# Altium PCB Powerboard PCB.PcbDoc
Units mil, origin at the board's own origin, x right, y up, seen from the top; angles counter-clockwise.
Board outline 2700 x 2100 mil, 2 copper layers (Top Layer, Bottom Layer), stack 62.8 mil thick; 13 components, 31 nets, 58 pads, 18 vias.
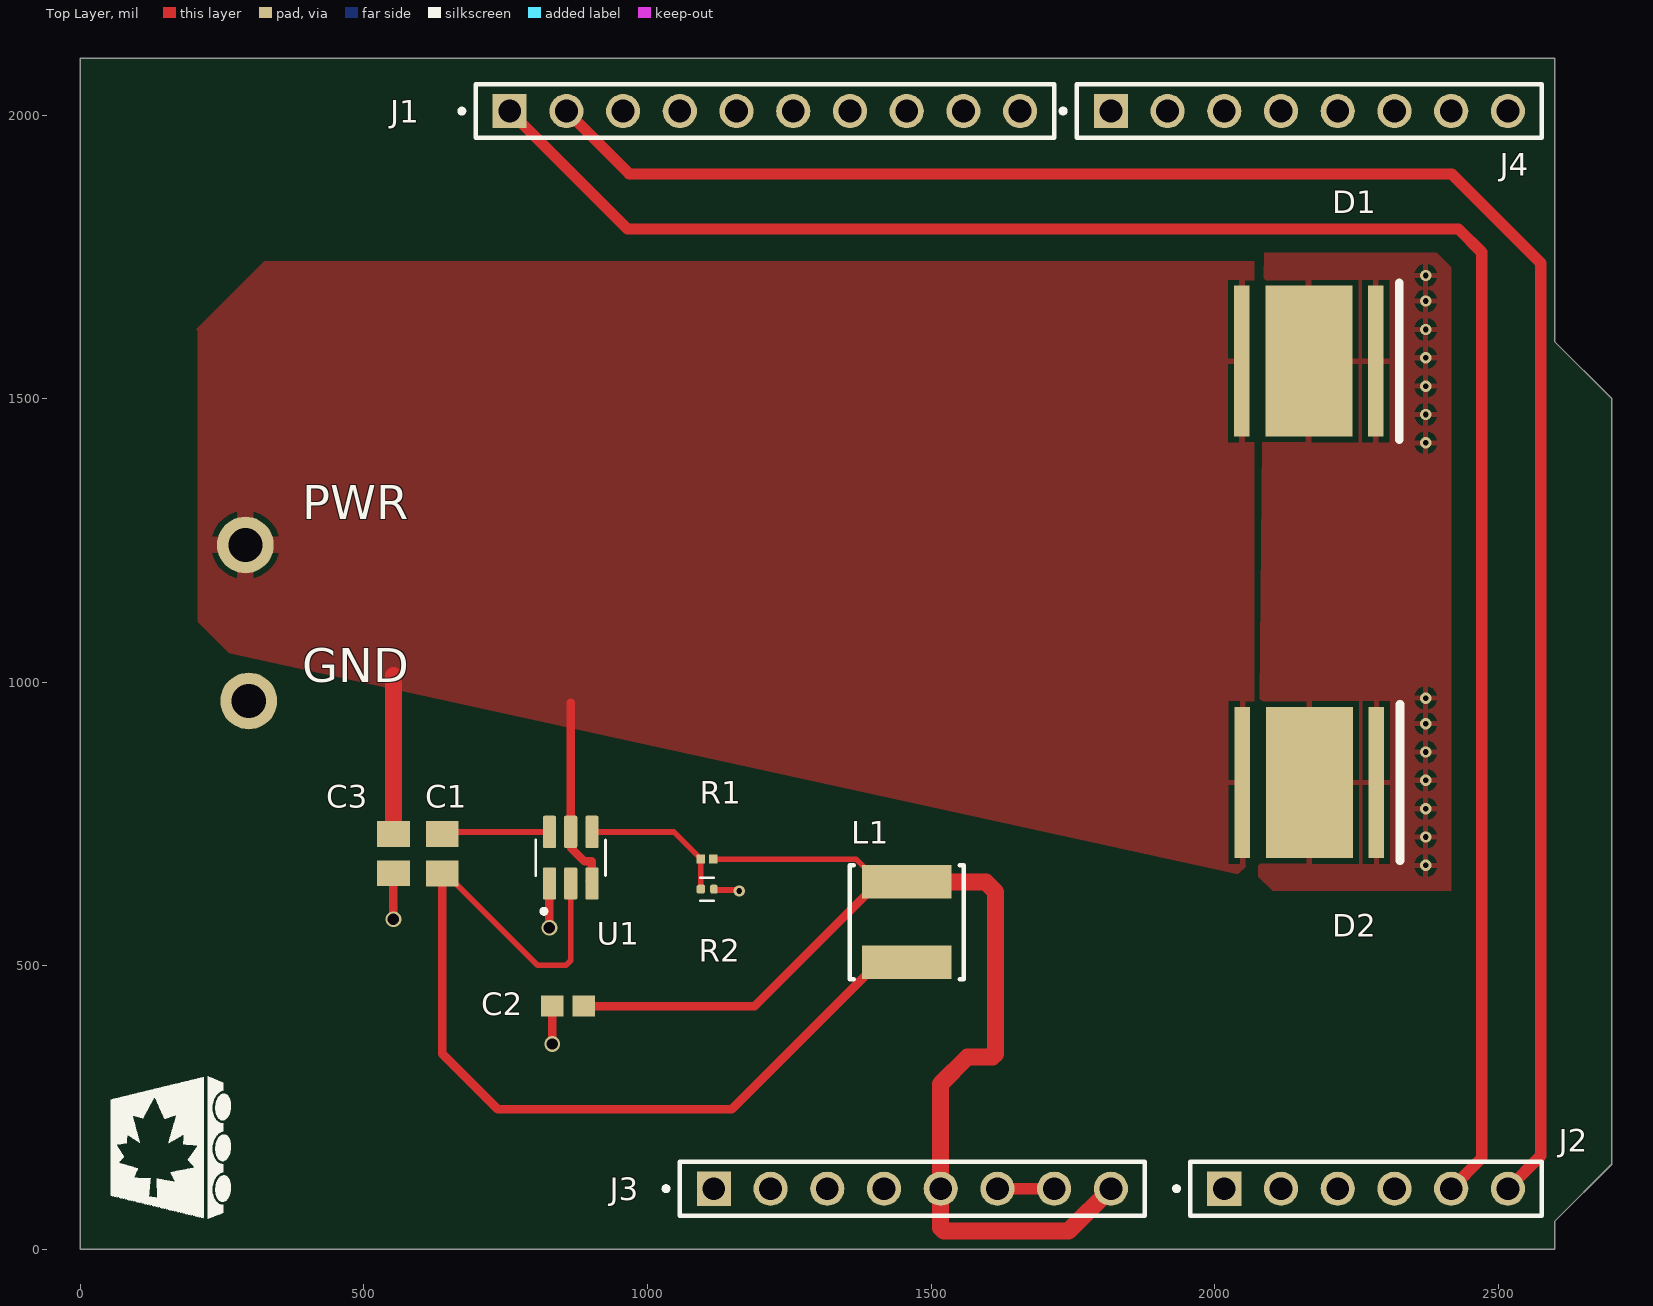
[diagram p0: Top Layer view]
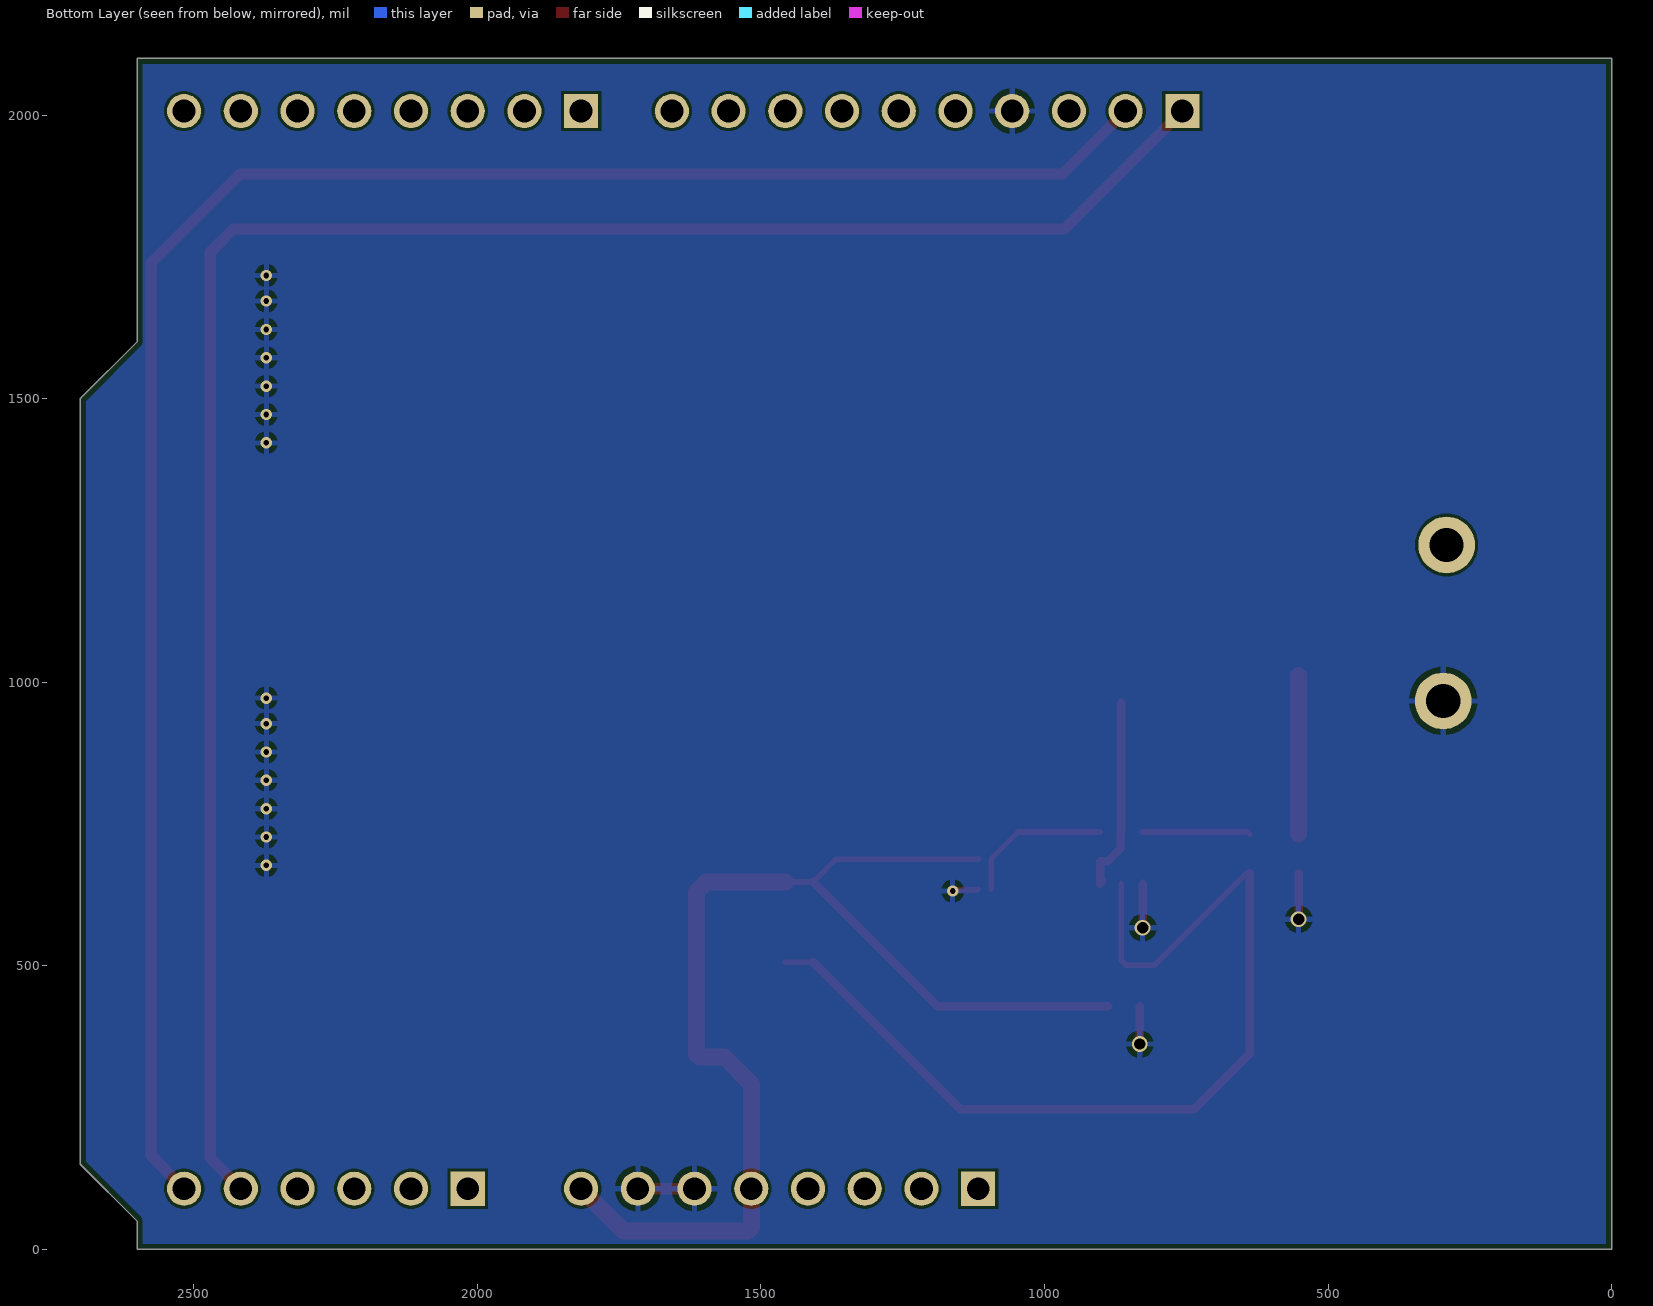
[diagram p1: Bottom Layer view, seen from below]

## Layer stack, top to bottom
Top Solder: solder mask 0.4, Solder Resist, Dk 3.5
Top Layer: signal copper 1.4
Dielectric 1: dielectric 60, FR-4, Dk 4.8
Bottom Layer: signal copper 1.4
Bottom Solder: solder mask 0.4, Solder Resist, Dk 3.5

## Board outline
0,0 0,2100 2600,2100 2600,1600 2700,1500 2700,150 2600,50 2600,0

## Design rules (kind name [scope] priority, off if disabled: settings)
BoardOutlineClearance [All] p1: gap=10 ignorepadtopadclearanceinfootprint=FALSE
Clearance [All] p1: gap=5 ignorepadtopadclearanceinfootprint=TRUE except(0: Arc-Hole Track-Hole SMDPad-Hole THPad-Hole Via-Hole Fill-Hole Poly-Hole Region-Hole Text-Hole)
MinimumSolderMaskSliver [All] p1: minsoldermaskwidth=5
PolygonConnect [All] p1: connectstyle=Relief reliefconductorwidth=10 reliefentries=4 polygonreliefangle="90 Angle" airgapwidth=10
RoutingVias [All] p1: holewidth=10 width=18 viastyle="Through Hole" minholewidth=6 minwidth=14 maxholewidth=28 maxwidth=50
SilkToSilkClearance [All] p1: silktosilkclearance=0
SilkToSolderMaskClearance [IsPad] p1: minsilkscreentomaskgap=0 clearancetoexposedcopper=TRUE
SolderMaskExpansion [All] p1: expansion=0 istentingtop=FALSE
Width [All] p1: maxlimit=30 minlimit=5 preferedwidth=10
27 further rules are at their usual default settings.

## Components (designator, comment, footprint, x,y, rotation, side; value= is the part's Value field where it differs from the comment)
C1 "0.1uF" CAPC2012X94N 638.18,697.45 r90 top
C2 "22uF" CAPC1608X100N 860.1,429.09 r0 top
C3 "10uF" CAPC2012X100N 552,697.65 r90 top
D1 "MKRAWT-00-0000-0D0HG235H" CREE-MK-R-2_V 2166,1566 r0 top
D2 "MKRAWT-00-0000-0D0HG235H" CREE-MK-R-2_V 2167,823 r0 top
J1 "10 pin Header" SAMTEC_SSQ-110-03-X-S 1207,2007 r180 top
J2 "6 pin Header" SAMTEC_SSQ-106-03-X-S 2267,107 r180 top
J3 "8 pin Header" SAMTEC_SSQ-108-03-X-S 1467,107 r180 top
J4 "8 pin Header" SAMTEC_SSQ-108-03-X-S 2167,2007 r180 top
L1 "4.7uH" FP-NR5040-H_4_1-MFG 1457,577 r270 top
R1 "56.2k" RESC0603X26N#1 1105.12,688.09 r0 top
R2 "10k" RESC0603X26N#2 1105.08,635.09 r180 top
U1 "TPS562200DDCR" SOT95P280X110-6N 864.59,690.57 r90 top

## Footprints (in the part's own frame and the unit in brackets; to place one, negate y for a bottom-side part, rotate by r counter-clockwise, add the part's x,y. Pads: shape width x height; smd on the part's side, far side on the other; paste and mask are expansions set on the pad)
CAPC1608X100N [mm]
  rect 1.01x0.93 smd: 1(-0.709,0) 2(0.709,0)
  body extent -0.8,-0.4 0.8,0.4, height 1
CAPC2012X94N [mm]
  rect 1.16x1.47 smd: 1(-0.88,0) 2(0.88,0)
CAPC2012X100N [mm]
  rect 1.15x1.47 smd: 1(-0.88,0) 2(0.88,0)
  body extent -1,-0.63 1,0.63, height 1
CREE-MK-R-2_V [mm] "SMD, 2-Leads, Body 7x7mm, Thermal Pad 3.9x6.76mm"
  rect 0.7x6.76 smd: 1(-3,0) 2(3,0)
  rect 3.9x6.76 smd: 3(0,0)
  silkscreen extent 4.05,-3.5 4.05,3.5, body extent -3.5,-3.5 3.5,3.5, height 4.1
FP-NR5040-H_4_1-MFG [mm]
  rect 1.5x4 smd paste+0 mask+0: 1(-1.8,0) 2(1.8,0)
  silkscreen extent -2.55,-2.55 2.55,2.55, body extent -2.65,-2.65 2.65,2.65, height 0.25
RESC0603X26N#1 [mm]
  rect 0.38x0.4 smd: 1(-0.281,0) 2(0.281,0)
RESC0603X26N#2 [mm]
  rrect50% 0.33x0.4 smd: 1(-0.305,0)
  rrect50% 0.38x0.4 smd: 2(0.28,0)
  silkscreen extent -0.3,-0.52 0.3,0.52
SAMTEC_SSQ-106-03-X-S [mm]
  rect 1.53x1.53 hole 1.02: 01(6.35,0)
  round 1.53 hole 1.02: 02(3.81,0) 03(1.27,0) 04(-1.27,0) 05(-3.81,0) 06(-6.35,0)
  silkscreen extent -7.88,-1.2 8.59,1.2
SAMTEC_SSQ-108-03-X-S [mm]
  rect 1.53x1.53 hole 1.02: 01(8.89,0)
  round 1.53 hole 1.02: 02(6.35,0) 03(3.81,0) 04(1.27,0) 05(-1.27,0) 06(-3.81,0) 07(-6.35,0) 08(-8.89,0)
  silkscreen extent -10.42,-1.2 11.13,1.2
SAMTEC_SSQ-110-03-X-S [mm]
  rect 1.53x1.53 hole 1.02: 01(11.43,0)
  round 1.53 hole 1.02: 02(8.89,0) 03(6.35,0) 04(3.81,0) 05(1.27,0) 06(-1.27,0) 07(-3.81,0) 08(-6.35,0) 09(-8.89,0) 10(-11.43,0)
  silkscreen extent -12.96,-1.2 13.67,1.2
SOT95P280X110-6N [mm]
  rrect25% 1.45x0.59 smd: 1(-1.155,0.95) 2(-1.155,0) 3(-1.155,-0.95) 4(1.155,-0.95) 5(1.155,0) 6(1.155,0.95)
  silkscreen extent -2.5,-1.57 0.8,1.57, body extent -1.4,-1.45 1.4,1.45, height 1.1

## Part data
C1: library part 08053C104KAT2A, "08053C104KAT2A Cap Ceramic 0.1uF 25V X7R 10% Pad SMD 0805 125ÂÂŽ T/R", Package=None, Availability=Unavailable, MF="{'manufacturer': u'AVX Interconnect / Elco'}", MP=08053C104KAT2A, Price=None
C2: library part C1608X5R1A226M080AC, "C1608X5R1A226M080AC 22µF ±20% 10V Ceramic Capacitor X5R 0603 (1608 Metric)", Package=None, Availability=Unavailable, MF="{'manufacturer': u'TDK'}", MP=C1608X5R1A226M080AC, Price=None
C3: library part C2012X5R1V106K085AC, "C2012X5R1V106K085AC 10µF ±10% 35V Ceramic Capacitor X5R 0805 (2012 Metric)", Package=None, Availability=Unavailable, MF="{'manufacturer': u'TDK'}", MP=C2012X5R1V106K085AC, Price=None
D1 D2: library part CMP-2100-00977-1, "LED, White, 12 V, 2-Pin SMD, RoHS, Tape and Reel"
J1: library part SSQ-110-03-X-S, "SSQ-110-03-X-S 10 Position Receptacle Connector Through Hole", Package=None, Availability=Unavailable, MF="{'manufacturer': u'Samtec'}", MP=SSQ-110-03-X-S, Price=None
J2: library part SSQ-106-03-X-S, "SSQ-106-03-X-S 6 Position Receptacle Connector Through Hole", Package=None, Availability=Unavailable, MF="{'manufacturer': u'Samtec Inc.'}", MP=SSQ-106-03-X-S, Price=None
J3 J4: library part SSQ-108-03-X-S, "SSQ-108-03-X-S", Package=None, Availability=Unavailable, MF="{'manufacturer': u'Samtec'}", MP=SSQ-108-03-X-S, Price=None
L1: library part CMP-14484-001014-1, "NR5040T4R7N SMD Power Inductors 4.7uH ±30% 3.1A 37.7mΩ", Case/Package=Nonstandard, Current Rating=3.1A, DC Resistance (DCR)=37.7mR, Inductance Tolerance=30%, Max DC Current=3.3A, Max Operating Temperature=120°C, Min Operating Temperature=-25°C, Package Quantity=1500, Resistor Type=Wirewound, Self Resonant Frequency=28MHz, Test Frequency=100kHz, Core Material=Ferrite, Depth=5.1mm, Halogen Free="Halogen Free", Height=4mm, Height - Seated (Max)=0.161inch, Inductance=4.7uH, Length=0.193inch, Mount="Surface Mount", Number of Pins=2, Packaging="Tape and Reel", Radiation Hardening=No, RMS Current (Irms)=3.1A, RoHS Compliant=Yes, Saturation Current=3.3A, Series=NR, Shielding=Shielded, Termination=SMD/SMT, Tolerance=30%, Width=4.9mm
R1: library part RC0201FR-0756K2L, "RC0201FR-0756K2L RES SMD 56.2K OHM 1% 1/20W 0201", Package=None, Availability=Unavailable, MF="{'manufacturer': u'Yageo'}", MP=RC0201FR-0756K2L, Price=None
R2: library part RC0201FR-0710KL, "RC0201FR-0710KL  10.0K 1% 0.05W TK200", Package=None, Availability=Unavailable, MF="{'manufacturer': u'Yageo'}", MP=RC0201FR-0710KL, Price=None
U1: Package=None, Availability=Unavailable, MF="{'manufacturer': u'Texas Instruments'}", MP=TPS562200DDCR, Price=None

## Free pads (board coordinates)
  round 100 hole 60: 1(291,1242) 1(297,967)

## Via types
v1: diameter 20, hole 10, Top Layer to Bottom Layer, 15 vias
v2: diameter 28, hole 20, Top Layer to Bottom Layer, 3 vias

## Nets (pads, with @x,y where several pads share a name; then routed paths per layer and width w, separated by ;. In a path a pad name is that pad's centre, name@x,y a point inside that pad or via, vN(x,y) a via of type N, cw(c..) or ccw(c..) an arc to the next point about the centre after c; other vN are vias at no path point)
3.3V: J3.04
+5: C2.2 J3.05 J3.08 L1.1 R1.2 | length 2124.1
  Top Layer w10: R1.2 1367.56,688.09 1407.79,647.87 L1.1
  Top Layer w15: C2.2 1189.02,429.09 L1.1@1407.79,647.87
  Top Layer w30: L1.1 1596.43,647.87 1614,630.29 1614,344.86 1608.14,339 1564,339 1517,292 J3.05 1517,37.86 1522.86,32 1742,32 J3.08
+12: C3.2 D1.1 D2.1 pad.1@291,1242 U1.3 U1.5 | length 636.2
  Top Layer w10: pad.1@297,1267 pad.1@303.11,1260.89 ; U1.5 U1.5@866,734.63
  Top Layer w15: U1.5 864.59,964 ; U1.5@866,734.63 866,707 889.01,683.99 901.99,683.99 U1.3 U1.3@897.87,649.21
  Top Layer w30: C3.2 552,1012
A0: J2.01
A1: J2.02
A2: J2.03
A3: J2.04
A4: J1.01 J2.05 | length 3490.5
  Top Layer w20: J1.01 965,1799 2430,1799 2471,1758 2471,161 J2.05
A5: J1.02 J2.06 | length 3485.1
  Top Layer w20: J1.02 968,1896 2418.14,1896 2575,1739.14 2575,165 J2.06
AREF: J1.03
D0: J4.08
D1: J4.07
D2: J4.06
D3: J4.05
D4: J4.04
D5: J4.03
D6: J4.02
D7: J4.01
D8: J1.10
D9: J1.09
D10: J1.08
D11: J1.07
D12: J1.06
D13: J1.05
GND: C2.1 C3.1 D1.2 D1.3 D2.2 D2.3 J1.04 J3.06 J3.07 pad.1@297,967 R2.1 U1.1 | length 372.6
  Top Layer w10: v2(827,567) v2@827.09,567.09 ; U1.1@827.09,645 U1.1 ; C2.1@832,428.91 C2.1 ; R2.1 1117.09,635.04 1118.59,633.55 1160.45,633.55 v1(1162,632)
  Top Layer w15: v2(552,582) C3.1 ; v2@827.09,567.09 U1.1@827.09,645 ; v2(832,362) C2.1@832,428.91
  Top Layer w20: J3.06 J3.07
  other v1: 2372,677 2372,727 2372,777 2372,827 2372,877 2372,927 2372,972 2372,1422 2372,1472 2372,1522 2372,1572 2372,1622 2372,1672 2372,1717
IOREF: J3.02
N-C: J3.01
NetC1_1: C1.1 L1.2 U1.2 | length 1717.2
  Top Layer w10: C1.1 644.29,662.8 806.09,501 856.14,501 864.59,509.44 U1.2 ; L1.2@1407.79,506.13 L1.2
  Top Layer w15: C1.1 638.18,344.82 736,247 1148.65,247 L1.2@1407.79,506.13
NetC1_2: C1.2 U1.6 | length 190.6
  Top Layer w10: C1.2 642.13,736.04 U1.6
NetR1_1: R1.1 R2.2 U1.4 | length 265.2
  Top Layer w10: U1.4 1046.51,736.04 1094.06,688.49 R1.1 R2.2
RESET: J3.03

## Polygon pours and split planes (outlines as drawn)
GND on Top Layer "GND_L01_P009" (solid, pour order 9): 2077,657 2102,632 2417,632 2417,1732 2392,1757 2087,1757
+12 on Top Layer "+12_L01_P017" (solid, pour order 17): 2037,662 2042,662 2070,690 2070,1742 324,1742 204,1622 207,1619 207,1107 263,1051
GND on Bottom Layer "GND_L02_P004" (solid, pour order 4): 2595,5 2595,51 2695,151 2695,1498 2595,1598 2595,2095 5,2095 5,5

## Silkscreen, mask and mechanical layers (free items; w line width, h text height)
Top Overlay:
  drawing of 5 lines, arcs and shapes, not listed
  text "PWR" at 391,1287 h60
  text "GND" at 391,1000 h60
Mechanical 1:
  the board outline again, w10